# Altium PCB PCB1.PcbDoc
Units mm, origin at the board's own origin, x right, y up, seen from the top; angles counter-clockwise.
Board outline 152.4 x 101.6 mm, 2 copper layers (Top Layer, Bottom Layer); 66 components, 12 nets, 226 pads, 0 vias.
Unrouted connection lines stored in the file: 2.
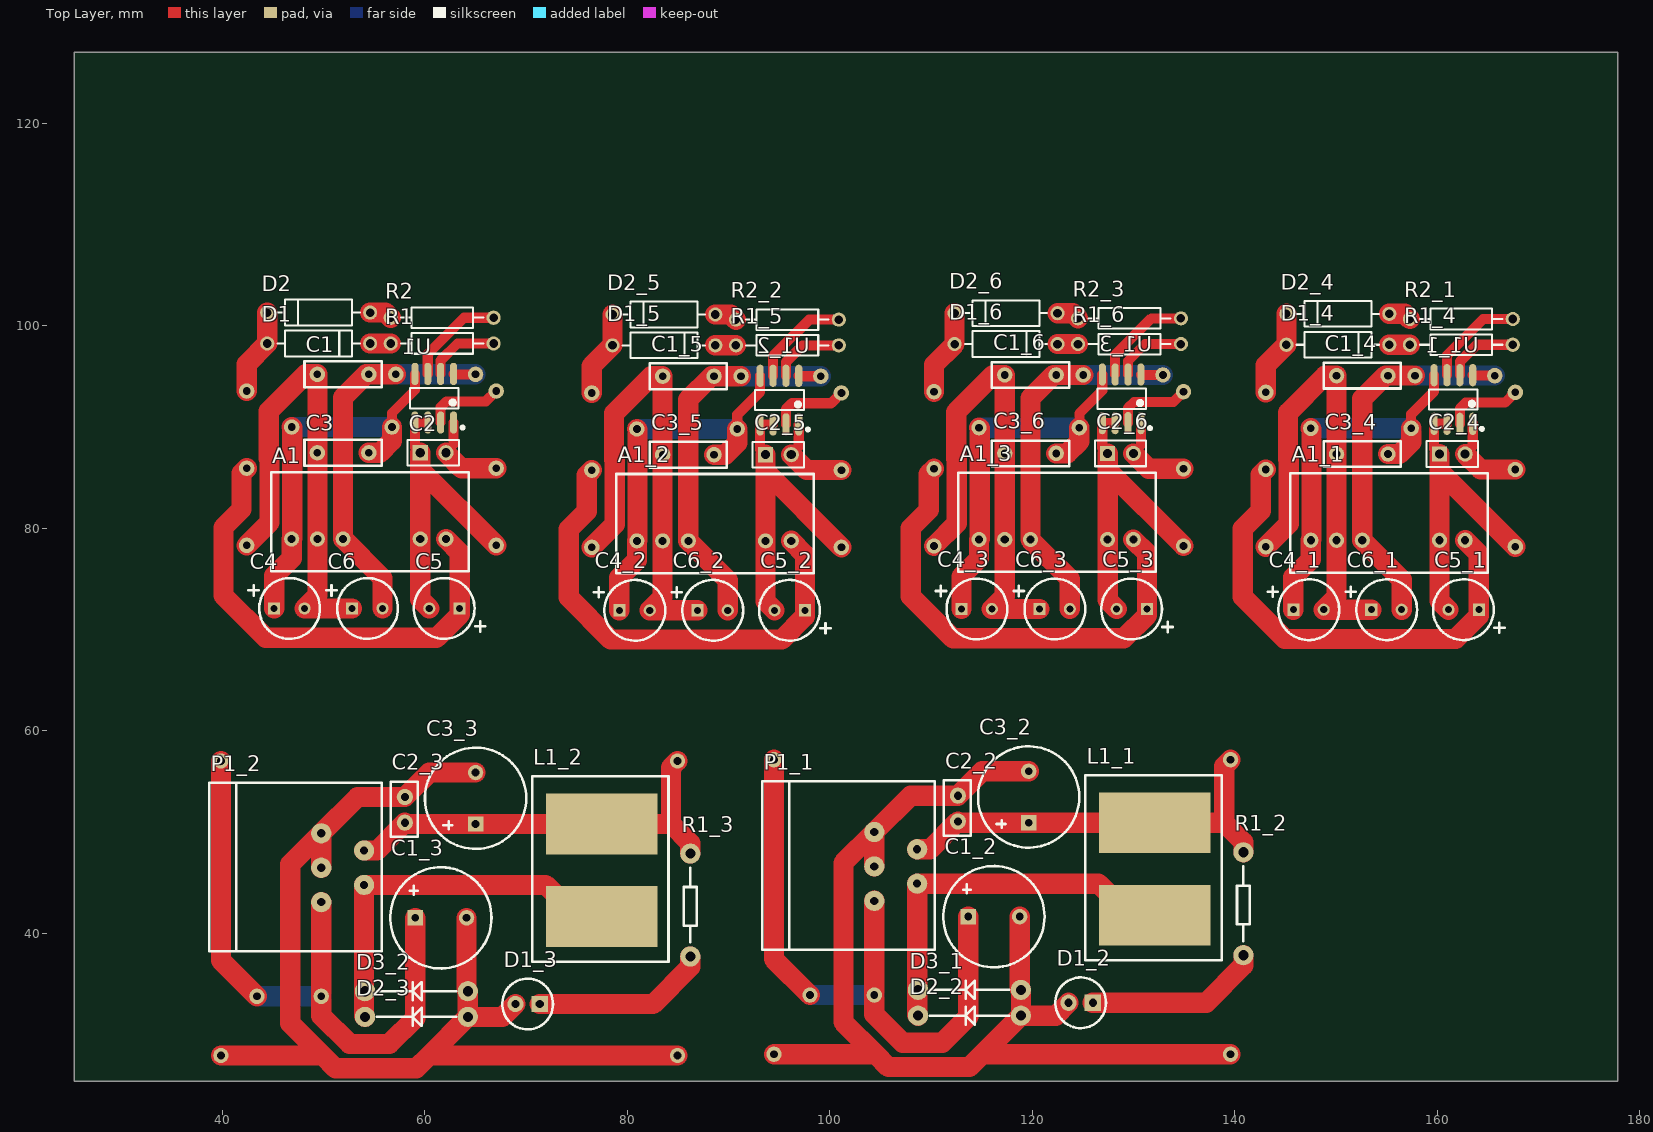
[diagram p0: Top Layer view]
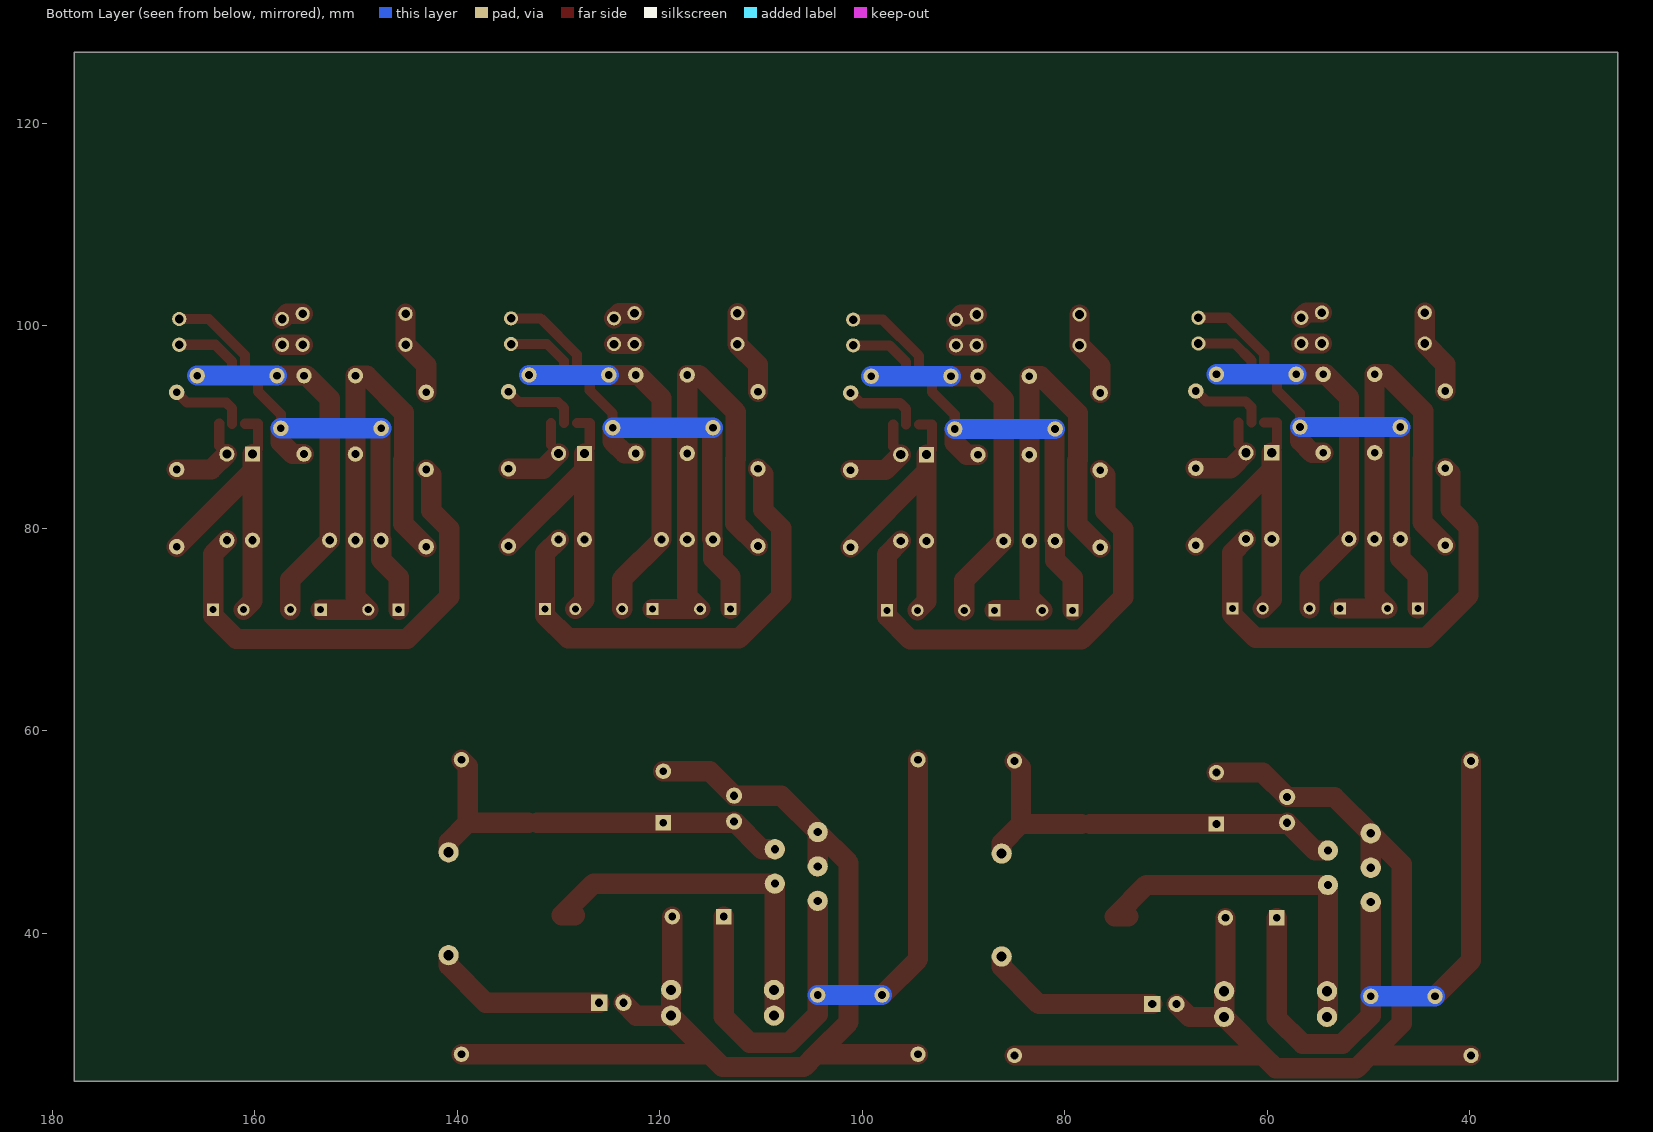
[diagram p1: Bottom Layer view, seen from below]

## Layer stack, top to bottom
Top Solder: solder mask 0.0102, Solder Resist, Dk 3.5
Top Layer: signal copper 0.0356
Dielectric 1: dielectric 0.32, FR-4, Dk 4.8
Bottom Layer: signal copper 0.0356
Bottom Solder: solder mask 0.0102, Solder Resist, Dk 3.5

## Board outline
25.4,25.4 177.8,25.4 177.8,127 25.4,127

## Design rules (kind name [scope] priority, off if disabled: settings)
Clearance [All] p1: gap=0.254 ignorepadtopadclearanceinfootprint=FALSE except(0: Arc-Hole Track-Hole SMDPad-Hole THPad-Hole Via-Hole Fill-Hole Poly-Hole Region-Hole Text-Hole)
PolygonConnect [All] p1: connectstyle=Relief reliefconductorwidth=0.254 reliefentries=4 polygonreliefangle="90 Angle" airgapwidth=0.254
RoutingVias [All] p1: holewidth=0.711 width=1.27 viastyle="Through Hole" minholewidth=0.711 minwidth=1.27 maxholewidth=0.711 maxwidth=1.27
SolderMaskExpansion [All] p1: expansion=0.102 istentingtop=FALSE
Width [All] p1: maxlimit=4 minlimit=0.254 preferedwidth=0.254
30 further rules are at their usual default settings.

## Classes and differential pairs
component class Sheet1: A1 C1 C3 C4 C5 C6 D1 D2 R1 R2 U1

## Components (designator, comment, footprint, x,y, rotation, side; value= is the part's Value field where it differs from the comment)
A1 "DC/DC" "DC/DC+-12 QD" 62.103,78.946 r180 top
A1_1 "DC/DC" "DC/DC+-12 QD" 162.74,78.819 r180 top (schematic designator A1)
A1_2 "DC/DC" "DC/DC+-12 QD" 96.192,78.758 r180 top (schematic designator A1)
A1_3 "DC/DC" "DC/DC+-12 QD" 129.974,78.885 r180 top (schematic designator A1)
C1 "Cap" DuShi 49.403,95.202 r0 top value=1μF
C1_2 "Cap Pol1" C_470uF 116.205,41.656 r0 top value=470uF (schematic designator C1)
C1_3 "Cap Pol1" C_470uF 61.595,41.529 r0 top value=470uF (schematic designator C1)
C1_4 "Cap" DuShi 150.04,95.075 r0 top value=1μF (schematic designator C1)
C1_5 "Cap" DuShi 83.492,95.014 r0 top value=1μF (schematic designator C1)
C1_6 "Cap" DuShi 117.274,95.141 r0 top value=1μF (schematic designator C1)
C2 "Cap" BAT-2 60.833,87.455 r0 top value=100nF
C2_2 "Cap Pol1" C-pF 112.649,51.054 r90 top value=0.1uF (schematic designator C2)
C2_3 "Cap Pol1" C-pF 58.039,50.927 r90 top value=0.1uF (schematic designator C2)
C2_4 "Cap" BAT-2 161.47,87.328 r0 top value=100nF (schematic designator C2)
C2_5 "Cap" BAT-2 94.922,87.267 r0 top value=100nF (schematic designator C2)
C2_6 "Cap" BAT-2 128.704,87.394 r0 top value=100nF (schematic designator C2)
C3 "Cap" DuShi 54.483,87.455 r180 top value=1μF
C3_2 "Cap Pol1" C_470uF 119.634,53.467 r90 top value=470uF (schematic designator C3)
C3_3 "Cap Pol1" C_470uF 65.024,53.34 r90 top value=470uF (schematic designator C3)
C3_4 "Cap" DuShi 155.12,87.328 r180 top value=1μF (schematic designator C3)
C3_5 "Cap" DuShi 88.572,87.267 r180 top value=1μF (schematic designator C3)
C3_6 "Cap" DuShi 122.354,87.394 r180 top value=1μF (schematic designator C3)
C4 "Cap Pol1" CAP-3 45.133,72.088 r0 top value=100μF
C4_1 "Cap Pol1" CAP-3 145.77,71.961 r0 top value=100μF (schematic designator C4)
C4_2 "Cap Pol1" CAP-3 79.222,71.9 r0 top value=100μF (schematic designator C4)
C4_3 "Cap Pol1" CAP-3 113.004,72.027 r0 top value=100μF (schematic designator C4)
C5 "Cap Pol1" CAP-3 63.452,72.088 r180 top value=100μF
C5_1 "Cap Pol1" CAP-3 164.089,71.961 r180 top value=100μF (schematic designator C5)
C5_2 "Cap Pol1" CAP-3 97.541,71.9 r180 top value=100μF (schematic designator C5)
C5_3 "Cap Pol1" CAP-3 131.323,72.027 r180 top value=100μF (schematic designator C5)
C6 "Cap Pol1" CAP-3 52.832,72.088 r0 top value=100μF
C6_1 "Cap Pol1" CAP-3 153.469,71.961 r0 top value=100μF (schematic designator C6)
C6_2 "Cap Pol1" CAP-3 86.921,71.9 r0 top value=100μF (schematic designator C6)
C6_3 "Cap Pol1" CAP-3 120.703,72.027 r0 top value=100μF (schematic designator C6)
D1 "Diode" DIODE-0.4 49.53,98.25 r0 top
D1_2 "LED1" LED 125.971,33.147 r180 top (schematic designator D1)
D1_3 "LED1" LED 71.361,33.02 r180 top (schematic designator D1)
D1_4 "Diode" DIODE-0.4 150.167,98.123 r0 top (schematic designator D1)
D1_5 "Diode" DIODE-0.4 83.619,98.062 r0 top (schematic designator D1)
D1_6 "Diode" DIODE-0.4 117.401,98.189 r0 top (schematic designator D1)
D2 "Diode" DIODE-0.4 49.53,101.298 r180 top
D2_2 "D Schottky" Diode 118.872,31.877 r180 top (schematic designator D2)
D2_3 "D Schottky" Diode 64.262,31.75 r180 top (schematic designator D2)
D2_4 "Diode" DIODE-0.4 150.167,101.171 r180 top (schematic designator D2)
D2_5 "Diode" DIODE-0.4 83.619,101.11 r180 top (schematic designator D2)
D2_6 "Diode" DIODE-0.4 117.401,101.237 r180 top (schematic designator D2)
D3_1 "D Schottky" Diode 118.872,34.417 r180 top (schematic designator D3)
D3_2 "D Schottky" Diode 64.262,34.29 r180 top (schematic designator D3)
L1_1 "68uH" L- 132.08,41.783 r90 top (schematic designator L1)
L1_2 "68uH" L- 77.47,41.656 r90 top (schematic designator L1)
P1_1 "LM2596T" LM2596-ChaJian 104.394,43.209 r180 top (schematic designator P1)
P1_2 "LM2596T" LM2596-ChaJian 49.784,43.082 r180 top (schematic designator P1)
R1 "Res2" AXIAL-0.4 61.722,98.25 r180 top value=3.3R
R1_2 "Res2" R 140.843,37.846 r90 top value=1K (schematic designator R1)
R1_3 "Res2" R 86.233,37.719 r90 top value=1K (schematic designator R1)
R1_4 "Res2" AXIAL-0.4 162.359,98.123 r180 top value=3.3R (schematic designator R1)
R1_5 "Res2" AXIAL-0.4 95.811,98.062 r180 top value=3.3R (schematic designator R1)
R1_6 "Res2" AXIAL-0.4 129.593,98.189 r180 top value=3.3R (schematic designator R1)
R2 "Res2" AXIAL-0.4 61.722,100.79 r180 top value=10R
R2_1 "Res2" AXIAL-0.4 162.359,100.663 r180 top value=10R (schematic designator R2)
R2_2 "Res2" AXIAL-0.4 95.811,100.602 r180 top value=10R (schematic designator R2)
R2_3 "Res2" AXIAL-0.4 129.593,100.729 r180 top value=10R (schematic designator R2)
U1 "1EDI60N12AF" SOIC-8 61.087,92.789 r180 top
U1_1 "1EDI60N12AF" SOIC-8 161.724,92.662 r180 top (schematic designator U1)
U1_2 "1EDI60N12AF" SOIC-8 95.176,92.601 r180 top (schematic designator U1)
U1_3 "1EDI60N12AF" SOIC-8 128.958,92.728 r180 top (schematic designator U1)

## Footprints (in the part's own frame and the unit in brackets; to place one, negate y for a bottom-side part, rotate by r counter-clockwise, add the part's x,y. Pads: shape width x height; smd on the part's side, far side on the other; paste and mask are expansions set on the pad)
AXIAL-0.4 [mm] "Axial Device, Thru-Hole; 2 Leads; 0.4 in Pin Spacing"
  round 1.4 hole 0.85: 1(-5.08,0) 2(5.08,0)
  silkscreen extent -4.06,-1.02 4.06,1.02
BAT-2 [mm] "Battery; 2 Leads"
  rect 1.5x1.5 hole 0.9: 1(-1.27,0)
  round 1.5 hole 0.9: 2(1.27,0)
  silkscreen extent -2.54,-1.27 2.54,1.27
C-pF [mm]
  round 1.6 hole 0.8 unplated: 1(0,0) 2(2.54,0)
  silkscreen extent -1.4,-1.27 4.06,1.4
C_470uF [mil]
  rect 60x60 hole 30: 1(-100,0)
  round 60 hole 30: 2(100,0)
  silkscreen extent -197,-197 197,197
CAP-3 [mm]
  rect 1.2x1.2 hole 0.7: 1(0,0)
  round 1.2 hole 0.7: 2(3,0)
  silkscreen extent -2.54,-3 4.52,3
"DC/DC+-12 QD" [mm]
  round 1.5 hole 0.8: 1(0,0) 2(2.54,0) 3(10.16,0) 4(12.7,0) 5(15.24,0)
  silkscreen extent -2.23,-6.6 17.27,3.2
Diode [mm]
  round 2 hole 1: 1(0,0) 2(10.16,0)
  silkscreen extent 1.14,-0.89 9.02,0.89
DIODE-0.4 [mm] "Diode, Thru-Hole; 2 Leads; 0.4 in Pin Spacing"
  round 1.4 hole 0.85: 1(-5.08,0) 2(5.08,0)
  silkscreen extent -4.06,-1.27 4.06,1.27
DuShi [mil]
  round 60 hole 30: 1(0,0) 2(200,0)
  silkscreen extent -50,-50 250,50
L- [mm]
  rect 6x11 smd: 1(0,0) 2(9.144,0)
  silkscreen extent -4.45,-6.6 13.84,6.86
LED [mm]
  rect 1.6x1.6 hole 0.8 unplated: 1(0,0)
  round 1.6 hole 0.8 unplated: 2(2.4,0)
  silkscreen extent -1.3,-2.5 3.7,2.5
LM2596-ChaJian [mm]
  round 2 hole 0.8: 1(0,0) 2(-4.23,-1.7) 3(0,-3.4) 4(-4.23,-5.1) 5(0,-6.8)
  silkscreen extent -5.97,-11.81 11.05,4.83
R [mm]
  round 2 hole 1: 1(0,0) 2(10.16,0)
  silkscreen extent 1.4,-0.63 8.76,0.64
SOIC-8 [mm]
  oval 0.7x2.2 smd: 1(-1.759,2.345) 2(-0.489,2.345) 3(0.781,2.345) 4(2.051,2.345) 5(2.051,-2.455) 6(0.781,-2.455) 7(-0.489,-2.455) 8(-1.759,-2.455)
  silkscreen extent -2.8,-1.06 2.55,2.99

## Part data
C1 C1_4 C1_5 C1_6 C2 C2_4 C2_5 C2_6 C3 C3_4 C3_5 C3_6: "Capacitor", LatestRevisionDate=17-Jul-2002, LatestRevisionNote="Re-released for DXP Platform.", PackageDescription="Radial Cap, Thru-Hole; 2 Leads; 0.3 in Pin Spacing", PackageReference=RAD-0.3, Published=8-Jun-2000, Publisher="Altium Limited"
C1_2 C1_3 C2_2 C2_3 C3_2 C3_3 C4 C4_1 C4_2 C4_3 C5 C5_1 C5_2 C5_3 C6 C6_1 C6_2 C6_3: "Polarized Capacitor (Radial)", LatestRevisionDate=17-Jul-2002, LatestRevisionNote="Re-released for DXP Platform.", PackageDescription="Polarized Capacitor (Radial); 2 Leads", PackageReference=RB7.6-15, Published=8-Jun-2000, Publisher="Altium Limited"
D1 D1_4 D1_5 D1_6 D2 D2_4 D2_5 D2_6: "Default Diode", Code_JEDEC=DO-214-AB, LatestRevisionDate=17-Jul-2002, LatestRevisionNote="Re-released for DXP Platform.", PackageDescription="DO-214-AB/SMC; 2 C-Bend Leads; Body 7.9 x 5.9 mm, inc. leads (LxW)", PackageReference=SMC, PackageVersion=Sep-1996, Published=8-Jun-2000, Publisher="Altium Limited"
D1_2 D1_3: "Typical RED GaAs LED", LatestRevisionDate=08-Jul-2005, LatestRevisionNote="Mech Layer 1 removed.", PackageDescription="LED; 2 Leads", PackageReference=LED-1, Published=8-Jun-2000, Publisher="Altium Limited"
D2_2 D2_3 D3_1 D3_2: "Schottky Diode", Code_JEDEC=DO-214-AA, LatestRevisionDate=17-Jul-2002, LatestRevisionNote="Re-released for DXP Platform.", PackageDescription="DO-214-AA/SMB; 2 C-Bend Leads; Body 5.3 x 3.6 mm, inc. leads (LxW)", PackageReference=SMB, Published=8-Jun-2000, Publisher="Altium Limited"
L1_1 L1_2: library part L
R1 R1_2 R1_3 R1_4 R1_5 R1_6 R2 R2_1 R2_2 R2_3: "Resistor", LatestRevisionDate=17-Jul-2002, LatestRevisionNote="Re-released for DXP Platform.", PackageDescription="Axial Device, Thru-Hole; 2 Leads; 0.4 in Pin Spacing", PackageReference=AXIAL-0.4, Published=8-Jun-2000, Publisher="Altium Limited"

## Free pads (board coordinates)
  round 1.524 hole 0.762: 2(39.878,57.023) 2(94.488,57.15) 3(39.878,27.94) 3(94.488,28.067) 4(84.963,27.94) 4(139.573,28.067) 5(84.963,57.023) 5(139.573,57.15) 6(49.784,33.782) 6(104.394,33.909) 7(43.434,33.782) 7(98.044,33.909) 22(56.769,89.995) 22(90.858,89.807) 22(124.64,89.934) 22(157.406,89.868) 23(46.863,89.995) 23(80.952,89.807) 23(114.734,89.934) 23(147.5,89.868) 24(57.15,95.202) 24(91.239,95.014) 24(125.021,95.141) 24(157.787,95.075) 25(65.024,95.202) 25(99.113,95.014) 25(132.895,95.141) 25(165.661,95.075) 26(42.418,78.311) 26(76.507,78.123) 26(110.289,78.25) 26(143.055,78.184) 27(42.418,93.551) 27(76.507,93.363) 27(110.289,93.49) 27(143.055,93.424) 28(42.418,85.931) 28(76.507,85.743) 28(110.289,85.87) 28(143.055,85.804) 29(67.056,78.311) 29(101.145,78.123) 29(134.927,78.25) 29(167.693,78.184) 30(67.056,85.931) 30(101.145,85.743) 30(134.927,85.87) 30(167.693,85.804) 31(67.056,93.551) 31(101.145,93.363) 31(134.927,93.49) 31(167.693,93.424)

## Nets (pads, with @x,y where several pads share a name; then routed paths per layer and width w, separated by ;. In a path a pad name is that pad's centre, name@x,y a point inside that pad or via, vN(x,y) a via of type N, cw(c..) or ccw(c..) an arc to the next point about the centre after c; other vN are vias at no path point)
3.3V: C2.2 pad.30@67.056,85.931 U1.1 | length 7.8
  Top Layer w1: 62.846,88.272 U1.1
  Top Layer w2: C2.2 63.627,85.931 pad.30@67.056,85.931
15V: A1.1 C5.1 pad.28@42.418,85.931 | length 47.5
  Top Layer w2: pad.28@42.418,85.931 41.91,85.423 41.91,81.867 40.132,80.089 40.132,73.358 44.291,69.199 61.169,69.199 63.452,71.482 C5.1 63.452,77.597 A1.1
+20v: A1.5 C3.1 C4.1 pad.22@56.769,89.995 pad.23@46.863,89.995 U1.5 | length 38.9
  Top Layer w1: pad.22@56.769,89.995 56.769,91.392 59.036,93.659 U1.5
  Top Layer w2: C4.1 45.133,75.311 46.863,77.041 A1.5 46.926,79.009 46.926,89.932 pad.23@46.863,89.995 ; C3.1 55.597,87.455 56.769,88.627 pad.22@56.769,89.995
  Bottom Layer w2: pad.23@46.863,89.995 pad.22@56.769,89.995
-4V: A1.3 C1.2 C6.2 pad.24@57.15,95.202 pad.25@65.024,95.202 U1.8 | length 38.7
  Top Layer w1: U1.8 62.888,95.202 pad.25@65.024,95.202
  Top Layer w2: C6.2 55.832,75.057 A1.3 51.943,92.916 54.229,95.202 C1.2 pad.24@57.15,95.202
  Bottom Layer w2: pad.24@57.15,95.202 pad.25@65.024,95.202
GND: A1.2 C2.1 C5.2 pad.29@67.056,78.311 U1.3 U1.4 | length 30.8
  Top Layer w1: C2.1 59.036,87.982 U1.4 U1.3
  Top Layer w2: C2.1 59.563,85.804 ; C5.2 59.563,72.977 A1.2 59.563,85.804 ; pad.29@67.056,78.311 59.563,85.804
GS: A1.4 C1.1 C3.2 C4.2 C6.1 pad.26@42.418,78.311 | length 48.8
  Top Layer w2: pad.26@42.418,78.311 44.672,80.565 44.672,86.865 44.609,86.928 44.609,91.551 48.26,95.202 C1.1 C3.2 A1.4 49.403,73.358 C4.2 C6.1
NetD1_2: D1.2 R1.2 | length 2
  Top Layer w2: D1.2 R1.2
NetD2_1: D2.1 R2.2 | length 2.2
  Top Layer w2: D2.1 56.134,101.298 R2.2
NetR1_1: R1.1 U1.7 | length 7.3
  Top Layer w1: U1.7 61.576,96.58 63.246,98.25 R1.1
NetR2_1: R2.1 U1.6 | length 9.9
  Top Layer w1: U1.6 60.306,97.215 63.881,100.79 R2.1
PWM: pad.31@67.056,93.551 U1.2 | length 7.6
  Top Layer w1: U1.2 61.576,91.949 62.162,92.535 66.04,92.535 pad.31@67.056,93.551
PWM3: D1.1 D2.2 pad.27@42.418,93.551 | length 8.6
  Top Layer w2: pad.27@42.418,93.551 42.418,96.218 D1.1 D2.2
pads on no net: A1_1.1 A1_1.2 A1_1.3 A1_1.4 A1_1.5 A1_2.1 A1_2.2 A1_2.3 A1_2.4 A1_2.5 A1_3.1 A1_3.2 A1_3.3 A1_3.4 A1_3.5 C1_2.1 C1_2.2 C1_3.1 C1_3.2 C1_4.1 C1_4.2 C1_5.1 C1_5.2 C1_6.1 C1_6.2 C2_2.1 C2_2.2 C2_3.1 C2_3.2 C2_4.1 C2_4.2 C2_5.1 C2_5.2 C2_6.1 C2_6.2 C3_2.1 C3_2.2 C3_3.1 C3_3.2 C3_4.1 C3_4.2 C3_5.1 C3_5.2 C3_6.1 C3_6.2 C4_1.1 C4_1.2 C4_2.1 C4_2.2 C4_3.1 C4_3.2 C5_1.1 C5_1.2 C5_2.1 C5_2.2 C5_3.1 C5_3.2 C6_1.1 C6_1.2 C6_2.1 C6_2.2 C6_3.1 C6_3.2 D1_2.1 D1_2.2 D1_3.1 D1_3.2 D1_4.1 D1_4.2 D1_5.1 D1_5.2 D1_6.1 D1_6.2 D2_2.1 D2_2.2 D2_3.1 D2_3.2 D2_4.1 D2_4.2 D2_5.1 D2_5.2 D2_6.1 D2_6.2 D3_1.1 D3_1.2 D3_2.1 D3_2.2 L1_1.1 L1_1.2 L1_2.1 L1_2.2 P1_1.1 P1_1.2 P1_1.3 P1_1.4 P1_1.5 P1_2.1 P1_2.2 P1_2.3 P1_2.4 P1_2.5 R1_2.1 R1_2.2 R1_3.1 R1_3.2 R1_4.1 R1_4.2 R1_5.1 R1_5.2 R1_6.1 R1_6.2 R2_1.1 R2_1.2 R2_2.1 R2_2.2 R2_3.1 R2_3.2 U1_1.1 U1_1.2 U1_1.3 U1_1.4 U1_1.5 U1_1.6 U1_1.7 U1_1.8 U1_2.1 U1_2.2 U1_2.3 U1_2.4 U1_2.5 U1_2.6 U1_2.7 U1_2.8 U1_3.1 U1_3.2 U1_3.3 U1_3.4 U1_3.5 U1_3.6 U1_3.7 U1_3.8
copper on no net: | length 1292.3
  Top Layer w1: 90.858,89.807 90.858,91.204 93.125,93.471 93.125,95.056 ; 93.652,87.267 93.125,87.794 93.125,90.256 94.395,90.256 ; 94.395,95.056 94.395,97.027 97.97,100.602 100.891,100.602 ; 95.665,90.256 95.665,91.761 96.251,92.347 100.129,92.347 101.145,93.363 ; 95.665,95.056 95.665,96.392 97.335,98.062 100.891,98.062 ; 96.935,88.084 96.935,90.256 ; 96.935,95.056 96.977,95.014 99.113,95.014 ; 124.64,89.934 124.64,91.331 126.907,93.598 126.907,95.183 ; 127.434,87.394 126.907,87.921 126.907,90.383 128.177,90.383 ; 128.177,95.183 128.177,97.154 131.752,100.729 134.673,100.729 ; 129.447,90.383 129.447,91.888 130.033,92.474 133.911,92.474 134.927,93.49 ; 129.447,95.183 129.447,96.519 131.117,98.189 134.673,98.189 ; 130.717,88.211 130.717,90.383 ; 130.717,95.183 130.759,95.141 132.895,95.141 ; 157.406,89.868 157.406,91.265 159.673,93.532 159.673,95.117 ; 160.2,87.328 159.673,87.855 159.673,90.317 160.943,90.317 ; 160.943,95.117 160.943,97.088 164.518,100.663 167.439,100.663 ; 162.213,90.317 162.213,91.822 162.799,92.408 166.677,92.408 167.693,93.424 ; 162.213,95.117 162.213,96.453 163.883,98.123 167.439,98.123 ; 163.483,88.145 163.483,90.317 ; 163.483,95.117 163.525,95.075 165.661,95.075
  Top Layer w2: 39.878,27.94 49.911,27.94 ; 39.878,57.023 39.878,37.338 43.434,33.782 ; 49.784,43.082 49.784,33.782 49.784,31.877 52.578,29.083 56.515,29.083 59.055,31.623 59.055,41.529 ; 49.784,46.482 49.784,49.882 ; 54.014,48.182 55.294,48.182 58.039,50.927 58.166,50.8 65.024,50.8 77.47,50.8 ; 54.102,31.75 54.014,31.838 54.014,44.782 71.931,44.782 75.057,41.656 73.738,41.656 ; 64.135,41.529 64.135,34.417 64.262,34.29 64.262,31.75 ; 65.024,55.88 60.452,55.88 58.039,53.467 53.369,53.467 49.784,49.882 ; 68.961,33.02 67.691,31.75 64.262,31.75 ; 71.361,33.02 82.55,33.02 86.233,36.703 86.233,37.719 ; 76.507,78.123 78.761,80.377 78.761,86.677 78.698,86.74 78.698,91.363 82.349,95.014 83.492,95.014 83.492,87.267 83.492,78.758 83.492,73.17 82.222,71.9 86.921,71.9 ; 76.507,85.743 75.999,85.235 75.999,81.679 74.221,79.901 74.221,73.17 78.38,69.011 95.259,69.011 97.541,71.294 97.541,71.9 97.541,77.409 96.192,78.758 ; 76.507,93.363 76.507,96.03 78.539,98.062 78.539,101.11 ; 78.359,50.8 84.328,50.8 ; 79.222,71.9 79.222,75.123 80.952,76.853 80.952,78.758 81.015,78.821 81.015,89.744 80.952,89.807 ; 84.963,27.94 60.452,27.94 ; 84.963,57.023 84.328,56.388 84.328,50.8 ; 86.233,47.879 86.233,48.895 84.328,50.8 ; 88.572,87.267 89.687,87.267 90.858,88.439 90.858,89.807 ; 88.699,98.062 90.731,98.062 ; 88.699,101.11 90.223,101.11 90.731,100.602 ; 89.921,71.9 89.921,74.869 86.032,78.758 86.032,92.728 88.318,95.014 88.572,95.014 91.239,95.014 ; 93.652,87.267 93.652,85.616 ; 94.488,28.067 104.521,28.067 ; 94.488,57.15 94.488,37.465 98.044,33.909 ; 94.541,71.9 93.652,72.789 93.652,78.758 93.652,85.616 ; 96.192,87.267 97.716,85.743 101.145,85.743 ; 101.145,78.123 93.652,85.616 ; 104.394,43.209 104.394,33.909 104.394,32.004 107.188,29.21 111.125,29.21 113.665,31.75 113.665,41.656 ; 104.394,46.609 104.394,50.009 ; 108.624,48.309 109.904,48.309 112.649,51.054 112.776,50.927 119.634,50.927 132.08,50.927 ; 108.712,31.877 108.624,31.965 108.624,44.909 126.541,44.909 129.667,41.783 128.348,41.783 ; 110.289,78.25 112.543,80.504 112.543,86.804 112.48,86.867 112.48,91.49 116.131,95.141 117.274,95.141 117.274,87.394 117.274,78.885 117.274,73.297 116.004,72.027 120.703,72.027 ; 110.289,85.87 109.781,85.362 109.781,81.806 108.003,80.028 108.003,73.297 112.162,69.138 129.041,69.138 131.323,71.421 131.323,72.027 131.323,77.536 129.974,78.885 ; 110.289,93.49 110.289,96.157 112.321,98.189 112.321,101.237 ; 113.004,72.027 113.004,75.25 114.734,76.98 114.734,78.885 114.797,78.948 114.797,89.871 114.734,89.934 ; 118.745,41.656 118.745,34.544 118.872,34.417 118.872,31.877 ; 119.634,56.007 115.062,56.007 112.649,53.594 107.979,53.594 104.394,50.009 ; 122.354,87.394 123.469,87.394 124.64,88.566 124.64,89.934 ; 122.481,98.189 124.513,98.189 ; 122.481,101.237 124.005,101.237 124.513,100.729 ; 123.571,33.147 122.301,31.877 118.872,31.877 ; 123.703,72.027 123.703,74.996 119.814,78.885 119.814,92.855 122.1,95.141 122.354,95.141 125.021,95.141 ; 125.971,33.147 137.16,33.147 140.843,36.83 140.843,37.846 ; 127.434,87.394 127.434,85.743 ; 128.323,72.027 127.434,72.916 127.434,78.885 127.434,85.743 ; 129.974,87.394 131.498,85.87 134.927,85.87 ; 132.969,50.927 138.938,50.927 ; 134.927,78.25 127.434,85.743 ; 139.573,28.067 115.062,28.067 ; 139.573,57.15 138.938,56.515 138.938,50.927 ; 140.843,48.006 140.843,49.022 138.938,50.927 ; 143.055,78.184 145.309,80.438 145.309,86.738 145.246,86.801 145.246,91.424 148.897,95.075 150.04,95.075 150.04,87.328 150.04,78.819 150.04,73.231 148.77,71.961 153.469,71.961 ; 143.055,85.804 142.547,85.296 142.547,81.74 140.769,79.962 140.769,73.231 144.928,69.072 161.807,69.072 164.089,71.355 164.089,71.961 164.089,77.47 162.74,78.819 ; 143.055,93.424 143.055,96.091 145.087,98.123 145.087,101.171 ; 145.77,71.961 145.77,75.184 147.5,76.914 147.5,78.819 147.563,78.882 147.563,89.805 147.5,89.868 ; 155.12,87.328 156.235,87.328 157.406,88.5 157.406,89.868 ; 155.247,98.123 157.279,98.123 ; 155.247,101.171 156.771,101.171 157.279,100.663 ; 156.469,71.961 156.469,74.93 152.58,78.819 152.58,92.789 154.866,95.075 155.12,95.075 157.787,95.075 ; 160.2,87.328 160.2,85.677 ; 161.089,71.961 160.2,72.85 160.2,78.819 160.2,85.677 ; 162.74,87.328 164.264,85.804 167.693,85.804 ; 167.693,78.184 160.2,85.677 ; 49.784,49.882 46.736,46.834 46.736,31.115 49.911,27.94 ; 49.911,27.94 51.181,26.67 59.182,26.67 60.452,27.94 ; 60.452,27.94 64.262,31.75 ; 104.394,50.009 101.346,46.961 101.346,31.242 104.521,28.067 ; 104.521,28.067 105.791,26.797 113.792,26.797 115.062,28.067 ; 115.062,28.067 118.872,31.877
  Bottom Layer w2: 43.434,33.782 49.784,33.782 ; 80.952,89.807 90.858,89.807 ; 91.239,95.014 99.113,95.014 ; 98.044,33.909 104.394,33.909 ; 114.734,89.934 124.64,89.934 ; 125.021,95.141 132.895,95.141 ; 147.5,89.868 157.406,89.868 ; 157.787,95.075 165.661,95.075